# EAGLE board Input-Model1 (EAGLE 7.5.0)
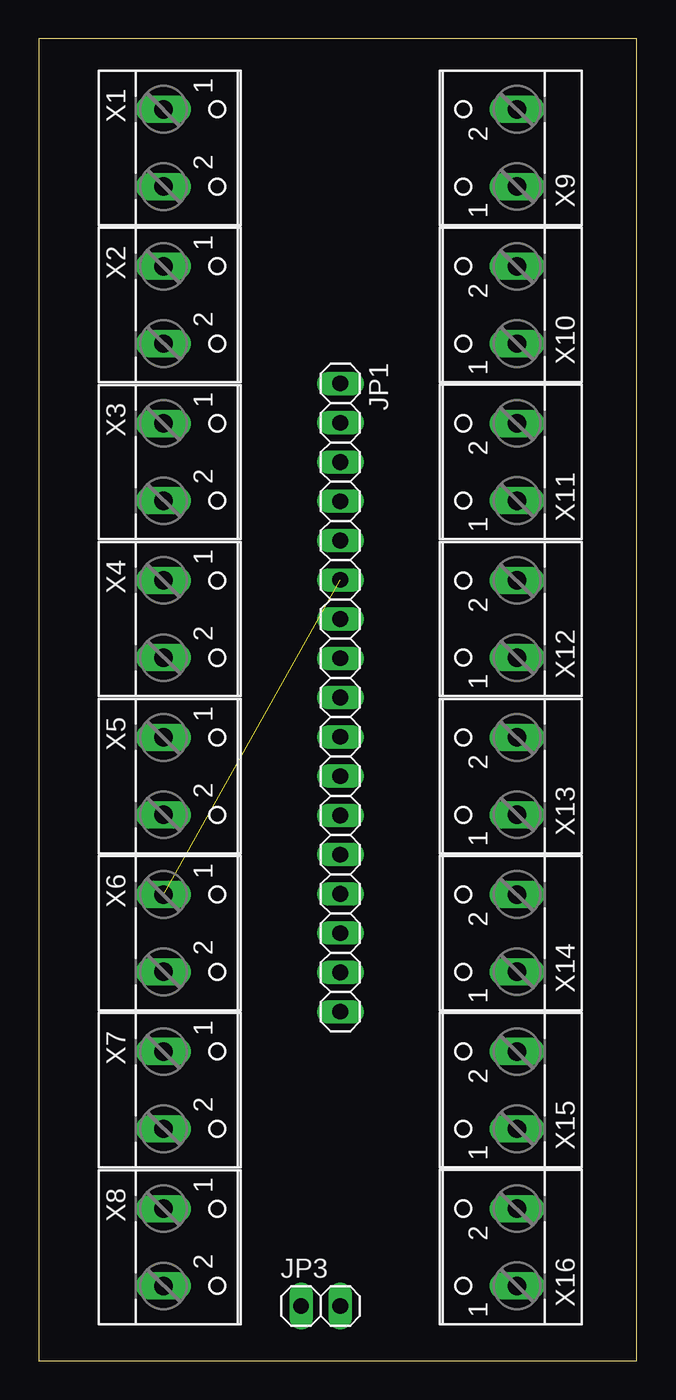
[diagram p0: board, top side]
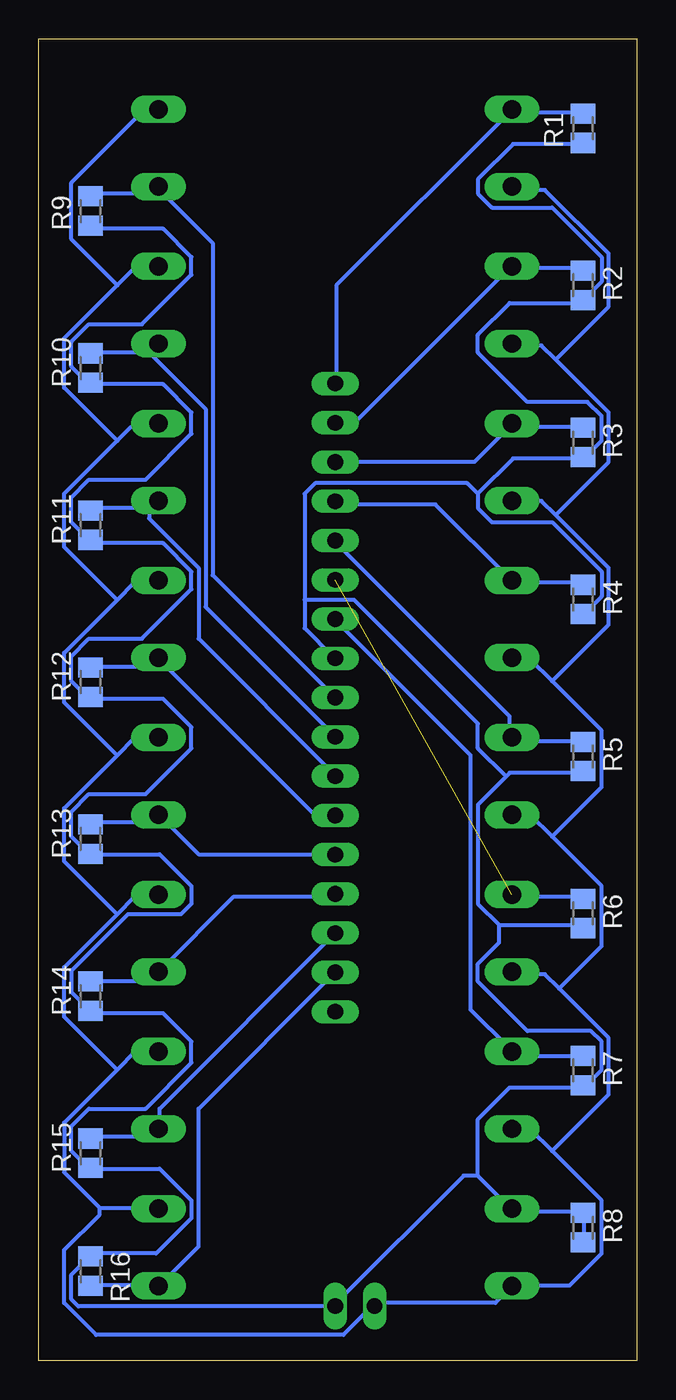
[diagram p1: board, bottom side, seen from below]

Size 38.69 x 85.54 mm. Coordinates in mm from the lower left corner, seen from the top.
Outline: 0,0 38.69,0 38.69,85.54 0,85.54 0,0
Copper layers (1*16): Top 0.035mm / dielectric 1.5mm / Bottom 0.035mm
Design rules "default": minimum track width 10mil, minimum drill 24mil, track to track 8mil, track to pad 8mil, pad to pad 8mil, via to via 8mil, smd to smd 8mil, copper to edge 40mil, drill to drill 8mil, minimum pad ring 10mil, minimum via ring 8mil, stop-mask expansion 4mil, vias tented up to drill 0mil, thermal gap 10mil

## Footprints (pad centres in the part's own frame; a part is rotated, then mirrored left to right if it is on the bottom)
1X17 = drill 1.016 long: 1 -20.32,0; 2 -17.78,0; 3 -15.24,0; 4 -12.7,0; 5 -10.16,0; 6 -7.62,0; 7 -5.08,0; 8 -2.54,0; 9 0,0; 10 2.54,0; 11 5.08,0; 12 7.62,0; 13 10.16,0; 14 12.7,0; 15 15.24,0; 16 17.78,0; 17 20.32,0
1X02 = drill 1.016 long: 1 -1.27,0; 2 1.27,0
M0805 = smd 1.3 x 1.6: 1 -0.95,0; 2 0.95,0
W237-102 = drill 1.194 long: 1 -2.5,-1.27; 2 2.5,-1.27

## Placement (x,y rotation side)
JP1  [1X17]  19.51,42.91 270 top
JP3  [1X02]  18.24,3.54 0 top
R1  [M0805]  3.49,79.74 90 bottom
R2  [M0805]  3.49,69.58 270 bottom
R3  [M0805]  3.49,59.42 270 bottom
R4  [M0805]  3.49,49.26 270 bottom
R5  [M0805]  3.49,39.1 270 bottom
R6  [M0805]  3.49,28.94 270 bottom
R7  [M0805]  3.49,18.78 270 bottom
R8  [M0805]  3.49,8.62 270 bottom
R9  [M0805]  35.33,74.39 90 bottom
R10  [M0805]  35.33,64.23 90 bottom
R11  [M0805]  35.33,54.07 90 bottom
R12  [M0805]  35.33,43.91 90 bottom
R13  [M0805]  35.33,33.75 90 bottom
R14  [M0805]  35.33,23.59 90 bottom
R15  [M0805]  35.33,13.43 90 bottom
R16  [M0805]  35.33,5.81 270 bottom
X1  [W237-102]  9.35,78.47 270 top
X2  [W237-102]  9.35,68.31 270 top
X3  [W237-102]  9.35,58.15 270 top
X4  [W237-102]  9.35,47.99 270 top
X5  [W237-102]  9.35,37.83 270 top
X6  [W237-102]  9.35,27.67 270 top
X7  [W237-102]  9.35,17.51 270 top
X8  [W237-102]  9.35,7.35 270 top
X9  [W237-102]  29.67,78.47 90 top
X10  [W237-102]  29.67,68.31 90 top
X11  [W237-102]  29.67,58.15 90 top
X12  [W237-102]  29.67,47.99 90 top
X13  [W237-102]  29.67,37.83 90 top
X14  [W237-102]  29.67,27.67 90 top
X15  [W237-102]  29.67,17.51 90 top
X16  [W237-102]  29.67,7.35 90 top

## Library data of the parts
JP1 JP3 = pinhead
R1-R16 = resistor
X1-X16 = con-wago-500; MPN: 237-102; OC_FARNELL: unknown; OC_NEWARK: 70K9898

## Nets
N$1: JP1.1 R1.2 X1.1
N$2: JP1.8 JP3.2 R1.1 R2.2 R3.2 R4.2 R5.2 R6.2 R7.2 R8.1 R8.2 R9.1 R10.1 R11.1 R12.1 R13.1 R14.1 R15.1 R16.1 X8.1
N$3: JP3.1 X1.2 X2.2 X3.2 X4.2 X5.2 X6.2 X7.2 X8.2 X9.2 X10.2 X11.2 X12.2 X13.2 X14.2 X15.2 X16.2
N$4: JP1.2 R2.1 X2.1
N$5: JP1.3 R3.1 X3.1
N$6: JP1.4 R4.1 X4.1
N$7: JP1.5 R5.1 X5.1
N$8: JP1.7 R7.1 X7.1
N$9: JP1.6 R6.1 X6.1
N$10: JP1.16 R16.2 X16.1
N$11: JP1.9 R9.2 X9.1
N$12: JP1.10 R10.2 X10.1
N$13: JP1.11 R11.2 X11.1
N$14: JP1.12 R12.2 X12.1
N$15: JP1.13 R13.2 X13.1
N$16: JP1.14 R14.2 X14.1
N$17: JP1.15 R15.2 X15.1

## Tracks (layer width: path | path; a pad name or v marks a point on that pad's centre or on a via)
N$1
  Bottom 0.254: R1.2 3.66,80.78 8,80.78 X1.1 8.23,80.78 19.43,69.58 19.43,63.41 JP1.1
N$2
  Bottom 0.254: R9.1 35.21,73.24 30.64,73.24 28.81,71.41 28.81,70.27 32.01,67.06 35.44,67.06 36.58,65.92 36.58,64.32 35.44,63.18 R10.1 35.21,63.18 30.64,63.18 28.81,61.35 28.81,59.98 31.78,57.01 35.44,57.01 36.58,55.86 36.58,54.26 35.44,53.12 R11.1 35.21,52.89 30.64,52.89 28.81,51.06 28.81,49.92 32.01,46.72 35.44,46.72 36.58,45.58 36.58,43.98 35.44,42.83 R12.1 35.21,42.83 30.64,42.83 28.81,41.01 28.81,39.63 31.78,36.66 35.44,36.66 36.58,35.52 36.58,33.92 35.44,32.77 R13.1 35.21,32.77 30.86,32.77 28.81,30.72 28.81,29.57 29.49,28.89 32.92,28.89 36.58,25.23 36.58,23.86 35.44,22.72 R14.1 35.21,22.49 30.64,22.49 28.81,20.66 28.81,19.29 31.78,16.32 35.44,16.32 36.58,15.17 36.58,13.57 35.44,12.43 R15.1 35.21,12.43 30.86,12.43 28.81,10.37 28.81,9.23 31.09,6.94 35.21,6.94 R16.1 35.44,6.71 36.58,5.57 36.58,3.97 36.12,3.52 19.66,3.52 JP3.2 19.43,3.74 11.2,11.97 10.29,11.97 | R1.1 3.66,78.72 8,78.72 10.29,76.44 10.29,75.52 9.38,74.61 5.49,74.61 2.29,71.41 2.29,69.81 3.43,68.67 R2.2 3.66,68.44 8.23,68.44 10.29,66.38 10.29,65.24 7.09,62.04 3.2,62.04 2.29,61.12 2.29,59.52 3.43,58.38 R3.2 3.66,58.38 8,58.38 10.29,56.09 | 10.29,56.09 10.29,55.18 9.38,54.26 5.49,54.26 2.29,51.06 2.29,49.46 3.43,48.32 R4.2 | 21.49,49.23 21.49,56.09 20.8,56.78 10.98,56.78 10.29,56.09 | 21.49,49.23 21.49,47.41 19.66,45.58 JP1.8 | 8.92,28.2 3.66,28.2 R6.2 | 8.92,28.2 10.29,29.57 10.29,35.98 8.46,37.8 | 8.46,37.8 8.23,38.03 3.66,38.03 R5.2 | R8.2 3.43,7.86 3.43,9.46 R8.1 3.66,9.69 8,9.69 X8.1 8.23,9.91 10.29,11.97 | 10.29,11.97 10.29,15.63 8.23,17.69 3.66,17.69 R7.2 3.43,17.69 2.29,18.83 2.29,20.66 2.98,21.34 7.09,21.34 10.29,24.55 10.29,25.69 8.92,27.06 8.92,28.2
  Bottom 0.254: 21.49,49.23 18.29,49.23 10.29,41.23 10.29,39.63 8.46,37.8
N$3
  Bottom 0.254: 34.75,9.91 31.09,9.91 X16.2 | 34.75,9.91 37.04,12.2 37.04,15.4 33.61,18.83 | 33.61,18.83 32.46,19.97 31.09,19.97 X15.2 | 33.61,28.89 37.04,25.46 37.04,22.26 33.61,18.83 | 33.61,28.89 32.46,30.03 31.09,30.03 X14.2 | 33.61,39.18 37.04,35.75 37.04,32.32 33.61,28.89 | 33.61,39.18 32.46,40.32 31.09,40.32 X13.2 | 33.61,49.23 37.04,45.81 37.04,42.6 33.61,39.18 | 33.61,49.23 32.46,50.38 31.09,50.38 X12.2 | 33.61,59.52 37.04,56.09 37.04,52.66 33.61,49.23 | 33.61,59.52 32.69,60.44 31.09,60.44 X11.2 | 33.61,69.58 37.04,66.15 37.04,62.95 33.61,59.52 | 33.61,69.58 32.46,70.72 31.09,70.72 X10.2 | 33.61,69.58 36.58,72.55 36.58,76.21 32.01,80.78 31.09,80.78 X9.2 | 5.49,13.57 2.29,10.37 2.29,6.94 4.35,4.89 8,4.89 X8.2 8.23,4.66 9.15,3.74 16.92,3.74 JP3.1 17.15,3.52 18.98,1.69 34.98,1.69 37.04,3.74 37.04,7.17 34.75,9.46 34.75,9.91 | 5.49,13.57 6.86,14.95 8,14.95 X7.2 | 5.03,24.09 1.83,20.89 1.83,17.23 5.49,13.57 | 5.03,24.09 5.95,25 8,25 X6.2 | 5.49,33.92 2.29,30.72 2.29,26.83 5.03,24.09 | 5.49,33.92 6.86,35.29 8,35.29 X5.2 | 5.49,43.98 2.29,40.78 2.29,37.12 5.49,33.92 | 5.49,43.98 6.86,45.35 8,45.35 X4.2 | 5.26,54.72 1.83,51.29 1.83,47.63 5.49,43.98 | 5.26,54.72 6.17,55.63 8,55.63 X3.2 | 5.26,64.78 1.83,61.35 1.83,58.15 5.26,54.72 | 5.26,64.78 6.17,65.69 8,65.69 X2.2 | 5.26,64.78 1.83,68.21 1.83,71.64 5.95,75.75 8,75.75 X1.2
N$4
  Bottom 0.254: R2.1 3.66,70.72 8,70.72 X2.1 8.23,70.72 18.06,60.89 19.43,60.89 JP1.2
N$5
  Bottom 0.254: R3.1 3.66,60.44 8,60.44 X3.1 8.23,60.44 10.52,58.15 JP1.3
N$6
  Bottom 0.254: R4.1 3.66,50.38 8,50.38 X4.1 8.23,50.61 13.03,55.41 19.43,55.41 JP1.4
N$7
  Bottom 0.254: R5.1 3.66,40.09 7.78,40.09 8,40.32 X5.1 8.23,40.55 8.23,41.69 19.43,52.89 JP1.5
N$8
  Bottom 0.254: R7.1 3.66,19.75 7.78,19.75 8,19.97 X7.1 8.23,20.2 10.75,22.72 10.75,39.18 19.43,47.86 JP1.7
N$9  (1 unrouted)
  Bottom 0.254: R6.1 3.66,30.03 8,30.03 X6.1
N$10
  Bottom 0.254: R16.2 35.21,4.89 31.09,4.89 X16.1 30.86,4.89 28.35,7.4 28.35,16.32 19.66,25 JP1.16
N$11
  Bottom 0.254: R9.2 35.21,75.52 31.32,75.52 31.09,75.75 X9.1 30.86,75.75 27.44,72.32 27.44,50.84 JP1.9
N$12
  Bottom 0.254: 31.55,65.24 35.21,65.24 R10.2 | 31.55,65.24 31.09,65.69 X10.1 31.55,65.24 | 31.55,65.24 27.89,61.58 27.89,48.78 19.66,40.55 JP1.10
N$13
  Bottom 0.254: 31.55,55.18 35.21,55.18 R11.2 | 31.55,55.18 31.09,55.63 X11.1 31.55,55.18 | 31.55,55.18 31.55,54.49 28.35,51.29 28.35,46.72 19.66,38.03 JP1.11
N$14
  Bottom 0.254: R12.2 35.21,44.89 31.55,44.89 31.09,45.35 X12.1 30.86,45.35 20.8,35.29 JP1.12
N$15
  Bottom 0.254: R13.2 35.21,34.83 31.55,34.83 31.09,35.29 X13.1 30.86,35.29 28.35,32.77 19.66,32.77 JP1.13
N$16
  Bottom 0.254: R14.2 35.21,24.55 31.55,24.55 31.09,25 X14.1 30.86,25.23 26.06,30.03 19.66,30.03 JP1.14
N$17
  Bottom 0.254: R15.2 35.21,14.49 31.55,14.49 31.09,14.95 X15.1 30.86,15.17 30.86,16.32 JP1.15